# Altium PCB 10515.0461_全联供输出板_V1.0.PcbDoc (part 3 of 4)
Units mm, origin at the board's own origin, x right, y up, seen from the top; angles counter-clockwise.
Board outline 141.98 x 134.8 mm, 2 copper layers (Top Layer, Bottom Layer); 149 components, 131 nets, 632 pads, 485 vias.
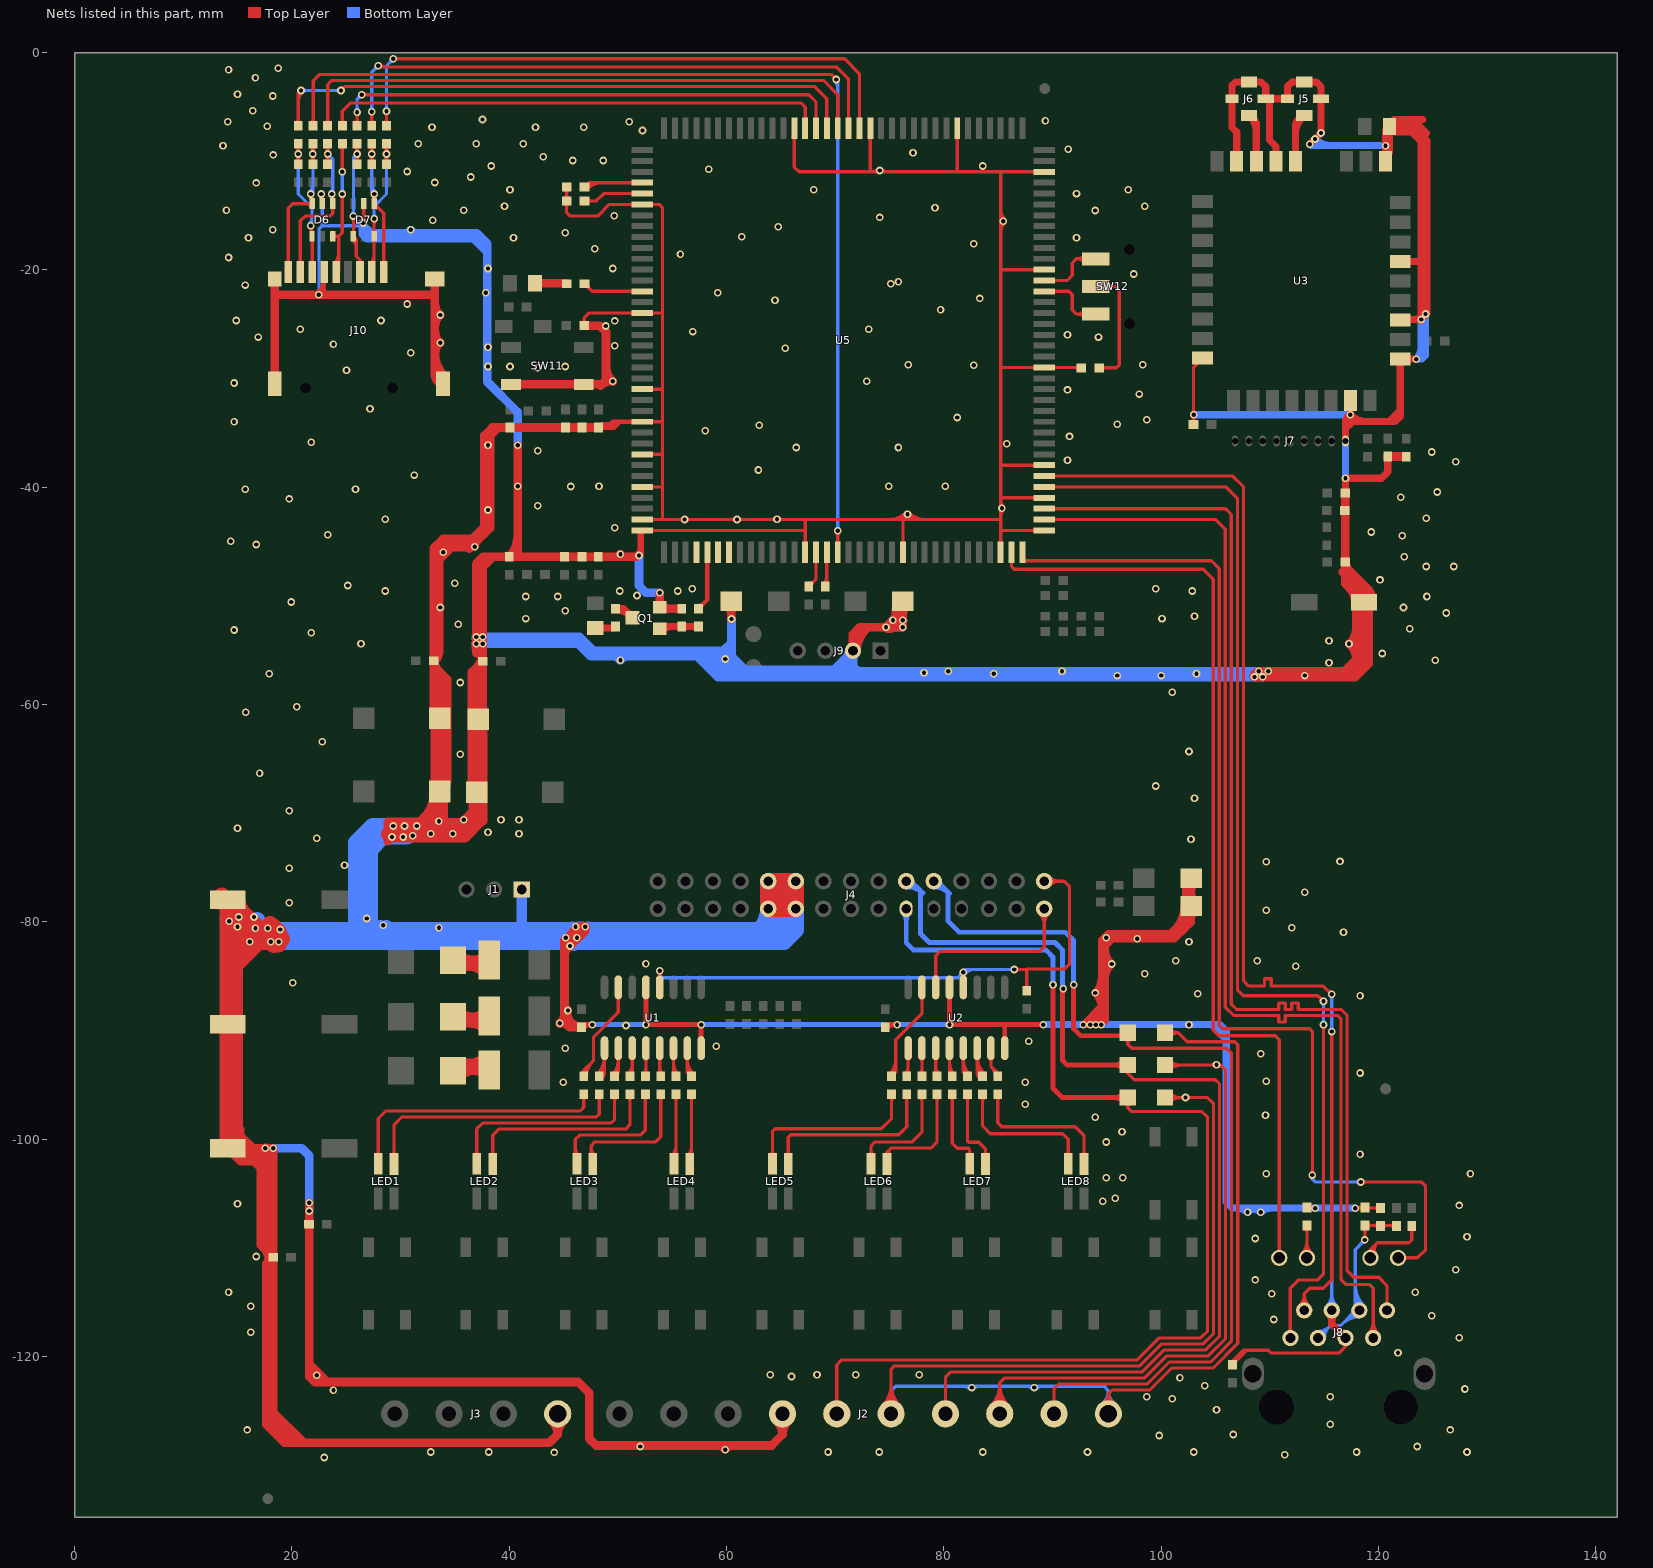
[diagram p3: the nets of this part, all layers, seen from the top]

## Via types
v1: diameter 0.7, hole 0.4, Top Layer to Bottom Layer, tented both sides, 485 vias

## Nets (pads, with @x,y where several pads share a name; then routed paths per layer and width w, separated by ;. In a path a pad name is that pad's centre, name@x,y a point inside that pad or via, vN(x,y) a via of type N, cw(c..) or ccw(c..) an arc to the next point about the centre after c; other vN are vias at no path point) (continued)
GND: (continued)
  other v1: 22.987,-129.301 111.379,-129.032 44.136,-128.831 32.766,-128.793 38.1,-128.793 69.342,-128.793 74.041,-128.793 83.566,-128.793 93.218,-128.793 102.997,-128.793 117.983,-128.793 128.143,-128.793 59.884,-128.577 52.07,-128.285 123.571,-128.285 99.822,-127.269 106.62,-127.18 15.875,-126.761 126.619,-126.761 115.57,-126.253 105.096,-124.894 101.032,-123.878 98.679,-123.713 115.57,-123.713 23.816,-123.116 127.956,-122.989 82.55,-122.862 88.332,-122.862 104.013,-122.697 101.727,-121.973 65.98,-121.846 22.292,-121.719 64.008,-121.681 68.326,-121.681 71.882,-121.681 77.724,-121.681 121.793,-119.649 127.448,-118.29 16.196,-117.782 110.363,-116.601 124.908,-116.258 16.196,-115.369 110.176,-114.226 14.164,-114.099 123.384,-114.099 108.652,-112.956 127.127,-112.029 16.704,-110.797 108.652,-109.146 128.143,-108.981 107.95,-106.733 109.16,-106.733 127.448,-106.098 14.986,-105.933 94.615,-105.717 95.758,-105.425 94.936,-103.558 96.46,-103.558 109.668,-103.177 128.464,-103.177 118.304,-101.399 94.936,-100.256 96.393,-99.329 93.92,-97.97 109.601,-97.805 87.503,-96.789 102.235,-96.167 44.958,-94.757 87.503,-94.757 109.668,-94.668 118.304,-93.906 105.096,-93.144 109.16,-92.128 45.152,-91.62 59.055,-91.44 87.824,-90.985 50.74,-89.535 93.472,-89.461 102.556,-89.461 44.644,-89.334 45.399,-88.153 118.304,-86.794 103.378,-86.629 93.92,-86.54 20.066,-85.613 98.492,-84.762 112.395,-84.089 52.578,-83.857 95.444,-83.873 101.346,-83.581 108.839,-83.581 45.593,-82.222 18.034,-81.841 102.556,-81.841 97.79,-81.549 45.212,-81.46 46.228,-81.46 94.936,-81.46 116.78,-80.952 18.923,-80.698 16.637,-80.571 17.78,-80.571 33.528,-80.533 112.014,-80.533 14.986,-80.444 46.101,-80.444 28.388,-80.317 26.888,-79.688 15.113,-79.555 16.51,-79.555 109.668,-78.92 19.752,-78.232 113.224,-77.269 19.752,-75.057 24.832,-74.803 109.668,-74.475 116.459,-74.437 102.743,-72.405 22.292,-72.316 29.21,-72.189 30.226,-72.189 31.115,-72.062 32.766,-71.897 34.798,-71.897 40.894,-71.897 38.04,-71.755 14.986,-71.389 30.353,-71.173 33.528,-70.739 35.814,-70.612 39.243,-70.612 40.894,-70.612 19.752,-69.776 103.064,-68.633 99.508,-67.49 17.018,-66.309 35.5,-64.569 102.556,-64.315 22.8,-63.426 15.748,-60.721 20.447,-60.213 101.032,-58.854 35.5,-57.965 95.952,-57.33 100.016,-57.33 113.224,-57.33 17.907,-57.165 84.582,-57.165 103.251,-57.165 78.172,-57.076 80.391,-56.949 90.872,-56.949 108.966,-56.949 115.443,-56.149 50.232,-55.933 125.222,-55.933 59.884,-55.806 120.336,-55.298 26.356,-54.409 117.288,-54.409 115.443,-54.117 21.784,-53.393 14.672,-53.139 122.876,-53.012 35.306,-52.593 76.2,-52.25 41.529,-52.085 100.076,-52.085 103.064,-51.869 126.238,-51.577 45.152,-51.361 33.655,-51.069 122.301,-51.069 19.939,-50.561 41.529,-50.053 44.45,-50.053 124.46,-50.053 51.756,-49.964 28.575,-49.545 50.165,-49.545 55.499,-49.545 102.87,-49.545 56.836,-49.329 99.508,-49.329 25.146,-49.037 34.992,-48.821 120.142,-48.529 124.4,-47.297 126.94,-47.297 122.368,-46.408 50.232,-46.154 33.909,-45.989 36.83,-45.481 16.704,-45.265 14.351,-44.973 122.174,-44.465 23.308,-44.376 119.32,-44.122 49.724,-43.741 56.134,-42.969 60.96,-42.969 28.575,-42.941 64.643,-42.941 124.4,-42.852 76.648,-42.471 38.04,-42.09 85.344,-41.925 42.612,-41.709 19.752,-41.074 122.047,-40.909 125.416,-40.439 15.688,-40.185 25.848,-40.185 45.66,-39.931 40.767,-39.893 48.26,-39.893 74.93,-39.893 80.137,-39.893 31.242,-38.877 62.932,-38.407 127.127,-37.645 91.38,-37.518 124.908,-36.756 42.612,-36.629 66.421,-36.337 75.819,-36.337 38.04,-36.121 85.792,-35.994 21.784,-35.867 91.567,-35.321 58.039,-34.813 62.992,-34.305 95.952,-34.216 14.672,-33.962 98.679,-33.797 81.22,-33.581 27.178,-32.781 97.984,-31.422 91.38,-31.041 14.672,-30.406 49.53,-30.241 72.898,-30.241 25.019,-29.225 42.612,-29.009 38.04,-28.882 40.072,-28.882 45.152,-28.882 82.744,-28.755 76.708,-28.717 98.298,-28.717 30.928,-27.612 65.405,-27.193 38.04,-27.104 49.724,-26.977 23.816,-26.85 33.655,-26.685 16.891,-26.177 94.234,-26.177 91.38,-25.961 56.896,-25.669 20.768,-25.453 73.092,-25.453 48.895,-25.161 49.724,-24.691 14.859,-24.653 28.194,-24.653 33.655,-24.145 79.696,-23.675 30.607,-23.129 64.456,-22.786 83.312,-22.621 37.846,-22.113 59.182,-22.113 15.688,-21.389 75.124,-21.262 75.819,-21.097 97.476,-20.373 38.04,-19.865 49.53,-19.865 14.164,-18.849 55.753,-18.557 47.879,-18.049 82.744,-17.579 16.002,-17.033 40.386,-17.033 92.202,-17.033 61.408,-16.944 45.152,-16.563 18.228,-16.309 30.928,-16.309 64.77,-16.017 85.471,-15.509 32.96,-15.42 74.108,-15.166 49.657,-15.001 93.92,-14.531 13.97,-14.493 35.814,-14.493 79.188,-14.277 39.564,-14.15 98.492,-14.15 22.694,-13.012 92.202,-12.969 40.072,-12.626 68.012,-12.626 96.968,-12.626 16.704,-11.991 33.147,-11.953 36.449,-11.445 30.607,-10.937 74.108,-10.848 58.36,-10.721 38.354,-10.429 83.566,-10.429 45.847,-9.921 48.641,-9.921 43.12,-9.578 18.288,-9.413 77.156,-9.197 91.44,-8.905 13.656,-8.562 31.623,-8.397 36.957,-8.397 41.275,-8.397 114.158,-7.942 52.264,-7.165 32.893,-6.873 42.418,-6.873 46.863,-6.873 17.72,-6.784 14.097,-6.365 51.054,-6.365 89.348,-6.276 37.532,-6.149 16.383,-5.349 18.228,-3.99 14.986,-3.825 16.637,-2.301 14.164,-1.577 18.736,-1.45
KNX_RS485_SELECT: U5.43
LED1: R35.1 U5.14 | length 7
  Top Layer w0.3: R35.1@46.926,-21.262 47.634,-21.969 U5.14@52.232,-21.969 ; R35.1@46.965,-21.518 cw(c46.965,-22.045) 47.337,-21.673 ; R35.1@47.221,-21.262 ccw(c47.932,-21.262) 47.429,-21.765 ; U5.14@51.419,-22.057 ccw(c51.205,-22.271) 51.205,-21.969 ccw(c51.205,-21.667) U5.14@51.419,-21.881
LED_FULL_COLOR_BLUE: R36.1 U5.41 | length 6.3
  Top Layer w0.4: R36.1@57.404,-51.17 58.232,-50.342 U5.41@58.232,-45.969 ; R36.1@57.404,-50.926 ccw(c57.404,-50.336) 57.821,-50.753 ; R36.1@57.61,-51.132 cw(c58.017,-51.132) R36.1@57.729,-50.845
LED_FULL_COLOR_GREEN: U5.42
LED_FULL_COLOR_RED: U5.40
MCU_CD: R66.1 U5.53 | length 100.7
  Top Layer w0.3: R66.1@21.747,-6.501 ccw(c21.207,-5.961) 21.971,-5.961 ; R66.1@21.971,-6.678 21.971,-5.472 21.971,-2.593 22.563,-2.001 69.639,-2.001 v1(70.104,-2.466) ; 21.971,-6.166 ccw(c22.445,-6.166) R66.1@22.11,-6.501 ; v1@69.904,-2.466 ccw(c69.421,-2.466) 69.763,-2.125 ccw(c70.104,-1.783) v1@70.104,-2.266 ; v1@70.091,-44.137 cw(c69.749,-44.479) 70.232,-44.479 cw(c70.715,-44.479) v1@70.373,-44.137 ; U5.53@70.144,-45.156 ccw(c69.93,-44.942) 70.232,-44.942 ccw(c70.534,-44.942) U5.53@70.32,-45.156 ; U5.53@70.232,-45.969 v1(70.232,-43.996)
  Bottom Layer w0.3: v1@69.963,-2.607 cw(c69.312,-3.258) 70.232,-3.258 ; v1@70.091,-43.855 ccw(c69.749,-43.513) 70.232,-43.513 ccw(c70.715,-43.513) v1@70.373,-43.855 ; v1(70.232,-43.996) 70.232,-8.816 ; 70.232,-8.562 70.232,-8.816 ; v1@70.232,-2.594 70.232,-8.816
MCU_CD1: D6.3 J10.9 R33.1 R66.2 | length 21.4
  Top Layer w0.3: J10.9@19.521,-19.389 ccw(c19.18,-19.048) 19.663,-19.048 ccw(c20.146,-19.048) J10.9@19.804,-19.389 ; J10.9@19.663,-20.181 19.663,-14.299 20.066,-13.896 D6.3@21.849,-13.896 v1@21.849,-13.012 ; v1@21.581,-13.153 cw(c20.933,-13.801) D6.3@21.849,-13.801 ; R33.1@21.747,-10.057 ccw(c21.31,-9.619) 21.929,-9.619 ccw(c22.548,-9.619) R33.1@22.11,-10.057 ; R66.2@21.747,-8.591 cw(c21.31,-9.029) 21.929,-9.029 cw(c22.548,-9.029) R66.2@22.11,-8.591 ; v1@21.787,-9.465 cw(c21.446,-9.807) 21.929,-9.807 cw(c22.412,-9.807) v1@22.07,-9.465 ; v1@21.787,-9.183 ccw(c21.446,-8.841) 21.929,-8.841 ccw(c22.412,-8.841) v1@22.07,-9.183 ; R33.1@21.929,-10.276 R66.2@21.929,-8.371
  Bottom Layer w0.3: v1@21.581,-12.871 ccw(c20.74,-12.03) 21.929,-12.03 ; v1@21.787,-9.465 cw(c21.446,-9.807) 21.929,-9.807 cw(c22.412,-9.807) v1@22.07,-9.465 ; v1@21.849,-13.012 21.929,-12.932 v1(21.929,-9.324)
  other v1: 21.722,-13.012
MCU_CLK: R69.1 U5.127 | length 47.8
  Top Layer w0.3: R69.1@24.457,-6.501 ccw(c24.019,-6.063) 24.638,-6.063 ccw(c25.257,-6.063) R69.1@24.819,-6.501 ; R69.1@24.638,-6.72 24.638,-5.387 25.4,-4.625 66.851,-4.625 67.232,-5.006 U5.127@67.232,-6.969 ; U5.127@67.144,-6.156 ccw(c66.93,-5.942) 67.232,-5.942 ccw(c67.534,-5.942) U5.127@67.32,-6.156
MCU_CLK1: D6.6 J10.5 R69.2 | length 18.1
  Top Layer w0.3: D6.6@23.749,-16.896 24.313,-16.896 ; J10.5@23.918,-19.389 ccw(c22.963,-18.435) 24.313,-18.435 ; J10.5@24.13,-19.602 ccw(c23.688,-19.159) 24.313,-19.159 ; J10.5@24.313,-20.181 24.313,-16.896 ; R69.2@24.457,-8.591 cw(c24.019,-9.029) 24.638,-9.029 cw(c25.257,-9.029) R69.2@24.819,-8.591 ; v1@24.497,-13.153 cw(c24.155,-13.495) 24.638,-13.495 cw(c25.121,-13.495) v1@24.779,-13.153 ; v1@24.497,-10.834 ccw(c24.155,-10.492) 24.638,-10.492 ccw(c25.121,-10.492) v1@24.779,-10.834 ; v1@24.638,-13.007 24.638,-16.571 24.313,-16.896 ; v1(24.638,-10.975) R69.2@24.638,-8.371
  Bottom Layer w0.3: v1@24.497,-12.871 ccw(c24.155,-12.529) 24.638,-12.529 ccw(c25.121,-12.529) v1@24.779,-12.871 ; v1@24.497,-11.116 cw(c24.155,-11.458) 24.638,-11.458 cw(c25.121,-11.458) v1@24.779,-11.116 ; v1@24.638,-13.007 v1(24.638,-10.975)
  other v1: 24.638,-13.012
MCU_CMD: R70.1 U5.126 | length 52
  Top Layer w0.3: R70.1@25.811,-6.501 ccw(c25.374,-6.063) 25.993,-6.063 ccw(c26.612,-6.063) R70.1@26.174,-6.501 ; v1@25.851,-5.613 cw(c25.51,-5.955) 25.993,-5.955 cw(c26.476,-5.955) v1@26.134,-5.613 ; R70.1@25.993,-6.72 v1(25.993,-5.472) ; v1(26.416,-3.863) 67.564,-3.863 68.232,-4.531 U5.126@68.232,-6.969 ; v1@26.557,-4.004 cw(c26.899,-4.346) 26.899,-3.863 cw(c26.899,-3.38) v1@26.557,-3.722 ; U5.126@68.144,-6.156 ccw(c67.93,-5.942) 68.232,-5.942 ccw(c68.534,-5.942) U5.126@68.32,-6.156
  Bottom Layer w0.3: v1@25.851,-5.33 ccw(c25.51,-4.989) 25.993,-4.989 ccw(c26.476,-4.989) v1@26.134,-5.33 ; v1(25.993,-5.472) 25.993,-4.286 v1(26.416,-3.863) ; v1@26.216,-3.863 cw(c25.733,-3.863) 26.075,-4.204 cw(c26.416,-4.546) v1@26.416,-4.063
MCU_CMD1: D7.4 J10.3 R30.1 R70.2 | length 22.7
  Top Layer w0.3: v1@25.513,-15.18 cw(c25.171,-15.522) 25.654,-15.522 cw(c26.137,-15.522) v1@25.795,-15.18 ; D7.4@25.583,-17.217 cw(c24.799,-18.001) 25.908,-18.001 ; v1(25.654,-15.039) D7.4@25.654,-16.896 25.908,-17.15 25.908,-18.722 26.258,-19.072 ; D7.4@25.795,-17.005 cw(c25.524,-17.276) 25.908,-17.276 ; R30.1@25.811,-10.057 ccw(c25.374,-9.619) 25.993,-9.619 ccw(c26.612,-9.619) R30.1@26.174,-10.057 ; R70.2@25.811,-8.591 cw(c25.374,-9.029) 25.993,-9.029 cw(c26.612,-9.029) R70.2@26.174,-8.591 ; v1@25.851,-9.465 cw(c25.51,-9.807) 25.993,-9.807 cw(c26.476,-9.807) v1@26.134,-9.465 ; v1@25.851,-9.183 ccw(c25.51,-8.841) 25.993,-8.841 ccw(c26.476,-8.841) v1@26.134,-9.183 ; R30.1@25.993,-10.276 R70.2@25.993,-8.371 ; J10.3@26.121,-19.384 ccw(c25.83,-19.072) 26.258,-19.072 ; 26.141,-18.955 cw(c25.613,-19.482) J10.3@26.357,-19.538 ; J10.3@26.258,-20.181 26.258,-19.072 ; J10.3@26.394,-19.384 cw(c26.685,-19.072) 26.258,-19.072
  Bottom Layer w0.3: v1@25.513,-14.898 ccw(c25.171,-14.556) 25.654,-14.556 ccw(c26.137,-14.556) v1@25.795,-14.898 ; v1(25.654,-15.039) 25.654,-9.663 v1(25.993,-9.324) ; 25.654,-10.624 cw(c27.293,-10.624) v1@26.134,-9.465 ; 25.654,-9.9 cw(c26.569,-9.9) v1@25.922,-9.253
MCU_DATA0: R68.1 U5.125 | length 60.4
  Top Layer w0.3: R68.1@20.393,-6.501 ccw(c19.955,-6.063) 20.574,-6.063 ccw(c21.193,-6.063) R68.1@20.755,-6.501 ; R68.1@20.574,-6.72 20.574,-3.736 v1(20.828,-3.482) ; 20.574,-4.578 cw(c21.924,-4.578) v1@20.969,-3.623 ; 20.574,-3.854 cw(c21.2,-3.854) v1@20.757,-3.411 ; v1(24.511,-3.482) 24.884,-3.109 68.08,-3.109 69.232,-4.261 U5.125@69.232,-6.969 ; v1@24.511,-3.282 ccw(c24.511,-2.799) 24.852,-3.141 ccw(c25.194,-3.482) v1@24.711,-3.482 ; U5.125@69.144,-6.156 ccw(c68.93,-5.942) 69.232,-5.942 ccw(c69.534,-5.942) U5.125@69.32,-6.156
  Bottom Layer w0.3: v1(20.828,-3.482) v1(24.511,-3.482) ; v1@20.969,-3.623 cw(c21.311,-3.965) 21.311,-3.482 cw(c21.311,-2.999) v1@20.969,-3.341 ; v1@24.37,-3.623 ccw(c24.028,-3.965) 24.028,-3.482 ccw(c24.028,-2.999) v1@24.37,-3.341
MCU_DATA1: R67.1 U5.124 | length 56
  Top Layer w0.3: R67.1@23.102,-6.501 ccw(c22.664,-6.063) 23.283,-6.063 ccw(c23.902,-6.063) R67.1@23.465,-6.501 ; R67.1@23.283,-6.72 23.283,-2.932 23.66,-2.555 68.923,-2.555 70.232,-3.864 U5.124@70.232,-6.969 ; U5.124@70.144,-6.156 ccw(c69.93,-5.942) 70.232,-5.942 ccw(c70.534,-5.942) U5.124@70.32,-6.156
MCU_DATA01: D6.4 J10.7 R31.1 R68.2 | length 19.8
  Top Layer w0.3: R31.1@20.393,-10.057 ccw(c19.955,-9.619) 20.574,-9.619 ccw(c21.193,-9.619) R31.1@20.755,-10.057 ; R68.2@20.393,-8.591 cw(c19.955,-9.029) 20.574,-9.029 cw(c21.193,-9.029) R68.2@20.755,-8.591 ; v1@20.433,-9.465 cw(c20.091,-9.807) 20.574,-9.807 cw(c21.057,-9.807) v1@20.715,-9.465 ; v1@20.433,-9.183 ccw(c20.091,-8.841) 20.574,-8.841 ccw(c21.057,-8.841) v1@20.715,-9.183 ; R31.1@20.574,-10.276 R68.2@20.574,-8.371 ; v1@21.576,-16.069 cw(c20.928,-16.717) D6.4@21.844,-16.717 ; J10.7@21.723,-19.389 ccw(c21.382,-19.048) 21.865,-19.048 ccw(c22.347,-19.048) J10.7@22.006,-19.389 ; D6.4@21.773,-17.217 cw(c21.553,-17.437) 21.865,-17.437 ; D6.4@21.844,-16.896 v1@21.844,-15.928 ; J10.7@21.865,-20.181 D6.4@21.865,-17.044
  Bottom Layer w0.3: v1@20.433,-9.465 cw(c20.091,-9.807) 20.574,-9.807 cw(c21.057,-9.807) v1@20.715,-9.465 ; v1(20.574,-9.324) 20.574,-13.007 21.844,-14.277 v1@21.844,-15.928 ; v1@21.576,-15.787 ccw(c20.928,-15.139) 21.844,-15.139
  other v1: 21.717,-15.928
MCU_DATA2: R72.1 U5.123 | length 58.5
  Top Layer w0.3: R72.1@27.166,-6.501 ccw(c26.728,-6.063) 27.347,-6.063 ccw(c27.966,-6.063) R72.1@27.529,-6.501 ; v1@27.206,-5.571 cw(c26.864,-5.912) 27.347,-5.912 cw(c27.83,-5.912) v1@27.489,-5.571 ; R72.1@27.347,-6.72 v1(27.347,-5.429) ; v1(27.94,-1.196) 28.059,-1.315 70.096,-1.315 71.232,-2.451 U5.123@71.232,-6.969 ; v1@28.081,-1.055 ccw(c28.71,-0.426) 28.71,-1.315 ; U5.123@71.144,-6.156 ccw(c70.93,-5.942) 71.232,-5.942 ccw(c71.534,-5.942) U5.123@71.32,-6.156
  Bottom Layer w0.3: v1@27.206,-5.288 ccw(c26.864,-4.946) 27.347,-4.946 ccw(c27.83,-4.946) v1@27.489,-5.288 ; v1(27.347,-5.429) 27.347,-1.789 v1(27.94,-1.196) ; v1@27.74,-1.196 cw(c27.257,-1.196) 27.599,-1.537 cw(c27.94,-1.879) v1@27.94,-1.396
MCU_DATA3: R71.1 U5.122 | length 58.6
  Top Layer w0.3: R71.1@28.521,-6.501 ccw(c28.083,-6.063) 28.702,-6.063 ccw(c29.321,-6.063) R71.1@28.883,-6.501 ; v1@28.561,-5.528 cw(c28.219,-5.87) 28.702,-5.87 cw(c29.185,-5.87) v1@28.843,-5.528 ; R71.1@28.702,-6.72 v1(28.702,-5.387) ; v1(29.337,-0.561) 70.866,-0.561 72.232,-1.927 U5.122@72.232,-6.969 ; U5.122@72.144,-6.156 ccw(c71.93,-5.942) 72.232,-5.942 ccw(c72.534,-5.942) U5.122@72.32,-6.156
  Bottom Layer w0.3: v1@28.561,-5.246 ccw(c28.219,-4.904) 28.702,-4.904 ccw(c29.185,-4.904) v1@28.843,-5.246 ; v1(28.702,-5.387) 28.702,-1.196 v1(29.337,-0.561) ; v1@29.137,-0.561 cw(c28.654,-0.561) 28.996,-0.902 cw(c29.337,-1.244) v1@29.337,-0.761
MCU_DATA11: D6.1 J10.8 R32.1 R67.2 | length 21.7
  Top Layer w0.3: J10.8@20.625,-19.389 ccw(c20.284,-19.048) 20.767,-19.048 ccw(c21.249,-19.048) J10.8@20.908,-19.389 ; J10.8@20.767,-20.181 20.767,-15.481 21.209,-15.039 23.495,-15.039 23.749,-14.785 D6.1@23.749,-13.896 v1@23.749,-13.007 ; R32.1@23.102,-10.057 ccw(c22.664,-9.619) 23.283,-9.619 ccw(c23.902,-9.619) R32.1@23.465,-10.057 ; R67.2@23.102,-8.591 cw(c22.664,-9.029) 23.283,-9.029 cw(c23.902,-9.029) R67.2@23.465,-8.591 ; v1@23.142,-9.465 cw(c22.8,-9.807) 23.283,-9.807 cw(c23.766,-9.807) v1@23.425,-9.465 ; v1@23.142,-9.183 ccw(c22.8,-8.841) 23.283,-8.841 ccw(c23.766,-8.841) v1@23.425,-9.183 ; R32.1@23.283,-10.276 R67.2@23.283,-8.371 ; v1@23.525,-13.153 cw(c22.983,-13.695) D6.1@23.749,-13.695
  Bottom Layer w0.3: v1@23.283,-9.524 cw(c23.283,-10.007) 23.625,-9.665 cw(c23.966,-9.324) v1@23.483,-9.324 ; v1(23.283,-9.324) 23.58,-9.62 23.749,-9.79 v1@23.749,-13.007 ; v1@23.525,-12.871 ccw(c22.983,-12.329) 23.749,-12.329
  other v1: 23.666,-13.012
MCU_DATA21: D7.1 J10.1 R50.1 R72.2 | length 20.6
  Top Layer w0.3: R50.1@27.166,-10.057 ccw(c26.728,-9.619) 27.347,-9.619 ccw(c27.966,-9.619) R50.1@27.529,-10.057 ; R72.2@27.166,-8.591 cw(c26.728,-9.029) 27.347,-9.029 cw(c27.966,-9.029) R72.2@27.529,-8.591 ; v1@27.206,-9.465 cw(c26.864,-9.807) 27.347,-9.807 cw(c27.83,-9.807) v1@27.489,-9.465 ; v1@27.206,-9.183 ccw(c26.864,-8.841) 27.347,-8.841 ccw(c27.83,-8.841) v1@27.489,-9.183 ; R50.1@27.347,-10.276 R72.2@27.347,-8.371 ; v1@27.418,-13.148 cw(c27.076,-13.49) 27.559,-13.49 cw(c28.042,-13.49) v1@27.7,-13.148 ; D7.1@27.559,-14.246 cw(c27.559,-15.091) 28.156,-14.493 ; v1(27.559,-13.007) D7.1@27.559,-13.896 28.454,-14.791 J10.1@28.454,-20.181 ; J10.1@28.312,-19.389 ccw(c27.971,-19.048) 28.454,-19.048 ccw(c28.936,-19.048) J10.1@28.595,-19.389
  Bottom Layer w0.3: v1@27.206,-9.465 cw(c26.864,-9.807) 27.347,-9.807 cw(c27.83,-9.807) v1@27.489,-9.465 ; 27.347,-12.013 ccw(c28.553,-12.013) v1@27.7,-12.866 ; v1(27.347,-9.324) 27.347,-12.795 v1(27.559,-13.007)
MCU_DATA31: D7.6 J10.2 R52.1 R71.2 | length 20
  Top Layer w0.3: J10.2@27.213,-19.391 ccw(c26.376,-18.555) 27.559,-18.555 ; J10.2@27.354,-20.183 27.354,-19.435 27.559,-19.23 D7.6@27.559,-16.896 v1(27.559,-15.293) ; v1@27.418,-15.434 cw(c27.076,-15.776) 27.559,-15.776 cw(c28.042,-15.776) v1@27.7,-15.434 ; R52.1@28.521,-10.057 ccw(c28.083,-9.619) 28.702,-9.619 ccw(c29.321,-9.619) R52.1@28.883,-10.057 ; R71.2@28.521,-8.591 cw(c28.083,-9.029) 28.702,-9.029 cw(c29.321,-9.029) R71.2@28.883,-8.591 ; v1@28.561,-9.465 cw(c28.219,-9.807) 28.702,-9.807 cw(c29.185,-9.807) v1@28.843,-9.465 ; v1@28.561,-9.183 ccw(c28.219,-8.841) 28.702,-8.841 ccw(c29.185,-8.841) v1@28.843,-9.183 ; R52.1@28.702,-10.276 R71.2@28.702,-8.371
  Bottom Layer w0.3: v1@27.418,-15.152 ccw(c27.076,-14.81) 27.559,-14.81 ccw(c28.042,-14.81) v1@27.7,-15.152 ; v1(27.559,-15.293) 27.559,-14.15 28.702,-13.007 v1(28.702,-9.324) ; v1@28.561,-9.465 cw(c28.219,-9.807) 28.702,-9.807 cw(c29.185,-9.807) v1@28.843,-9.465
MOD_BOOT_NAND: SW12.3 U5.93 | length 8.6
  Top Layer w0.3: U5.93@89.232,-21.969 91.512,-21.969 91.821,-22.278 91.821,-23.675 92.202,-24.056 SW12.3@93.98,-24.056 ; U5.93@90.045,-22.057 cw(c90.259,-22.271) 90.259,-21.969 cw(c90.259,-21.667) U5.93@90.045,-21.881 ; SW12.3@92.992,-24.374 ccw(c92.224,-25.142) 92.224,-24.056 ccw(c92.224,-22.97) SW12.3@92.992,-23.738
MOD_BOOT_SD: SW12.1 U5.94 | length 8.4
  Top Layer w0.3: U5.94@89.232,-20.969 91.352,-20.969 91.821,-20.5 91.821,-19.357 92.202,-18.976 SW12.1@93.98,-18.976 ; U5.94@90.045,-21.057 cw(c90.259,-21.271) 90.259,-20.969 cw(c90.259,-20.667) U5.94@90.045,-20.881 ; SW12.1@92.992,-19.294 ccw(c92.224,-20.062) 92.224,-18.976 ccw(c92.224,-17.89) SW12.1@92.992,-18.658
NET0_LED_ACT: J8.12 U5.70 | length 106.8
  Top Layer w0.3: U5.70@87.232,-45.969 87.232,-46.772 104.631,-46.772 105.353,-47.494 105.353,-89.531 105.664,-89.842 113.665,-89.842 113.919,-90.096 v1(113.919,-103.304) ; U5.70@87.32,-46.606 ccw(c87.722,-46.204) 87.722,-46.772 ; v1@113.778,-103.163 ccw(c113.436,-102.821) 113.919,-102.821 ccw(c114.402,-102.821) v1@114.06,-103.163 ; v1(118.364,-103.939) 123.952,-103.939 124.333,-104.32 124.333,-110.162 123.571,-110.924 J8.12@121.801,-110.924 ; v1@118.505,-104.08 cw(c118.847,-104.422) 118.847,-103.939 cw(c118.847,-103.456) v1@118.505,-103.798
  Bottom Layer w0.3: v1(113.919,-103.304) 113.919,-103.685 ; v1@118.223,-104.08 ccw(c117.881,-104.422) 117.881,-103.939 ccw(c117.881,-103.456) v1@118.223,-103.798 ; v1(118.364,-103.939) 114.173,-103.939 113.919,-103.685 ; 113.919,-103.685 cw(c114.182,-103.685) 114.033,-103.469 ccw(c114.182,-103.685) 113.919,-103.685 ; 113.919,-103.685 ccw(c113.656,-103.685) 113.805,-103.469 cw(c113.656,-103.685) 113.919,-103.685
NET0_LED_LINK: J8.9 U5.69 | length 88.9
  Top Layer w0.3: U5.69@86.144,-46.782 cw(c85.93,-46.996) 86.232,-46.996 cw(c86.534,-46.996) U5.69@86.32,-46.782 ; U5.69@86.232,-45.969 86.232,-47.296 86.487,-47.551 103.886,-47.551 104.799,-48.464 104.799,-89.993 105.283,-90.477 110.49,-90.477 110.871,-90.858 J8.9@110.871,-110.924
NET0_MDN0: J8.2 U5.72 | length 107.9
  Top Layer w0.3: U5.72@89.232,-42.969 105.019,-42.969 105.907,-43.857 105.907,-87.844 106.681,-88.618 108.204,-88.618 108.504,-88.618 109.104,-88.618 109.323,-88.618 109.623,-88.618 110.223,-88.618 110.823,-88.618 110.823,-89.218 111.423,-89.218 111.423,-88.618 113.538,-88.618 116.251,-88.618 116.54,-88.907 116.54,-112.91 117.013,-113.383 119.18,-113.383 119.511,-113.714 J8.2@119.511,-118.294 ; U5.72@90.045,-43.057 cw(c90.259,-43.271) 90.259,-42.969 cw(c90.259,-42.667) U5.72@90.045,-42.881 ; J8.2@119.087,-117.87 ccw(c118.062,-116.845) 119.511,-116.845 ccw(c120.96,-116.845) J8.2@119.935,-117.87
NET0_MDN1: J8.8 U5.75 | length 108.6
  Top Layer w0.3: U5.75@89.232,-39.969 105.956,-39.969 107.015,-41.028 107.015,-86.24 107.569,-86.794 114.427,-86.794 v1(114.935,-87.302) ; U5.75@90.045,-40.057 cw(c90.259,-40.271) 90.259,-39.969 cw(c90.259,-39.667) U5.75@90.045,-39.881 ; J8.8@111.891,-118.294 111.891,-113.714 112.649,-112.956 114.427,-112.956 114.935,-112.448 v1(114.935,-89.461) ; v1@114.735,-87.302 ccw(c114.252,-87.302) 114.594,-86.961 ccw(c114.935,-86.619) v1@114.935,-87.102 ; v1@114.794,-89.602 cw(c114.452,-89.944) 114.935,-89.944 cw(c115.418,-89.944) v1@115.076,-89.602
  Bottom Layer w0.3: v1@114.794,-89.32 ccw(c114.452,-88.978) 114.935,-88.978 ccw(c115.418,-88.978) v1@115.076,-89.32 ; v1@114.794,-87.443 cw(c114.452,-87.785) 114.935,-87.785 cw(c115.418,-87.785) v1@115.076,-87.443 ; v1(114.935,-89.461) v1(114.935,-87.302)
NET0_MDP0: J8.1 U5.73 | length 106.5
  Top Layer w0.3: U5.73@89.232,-41.969 105.924,-41.969 106.461,-42.506 106.461,-87.578 106.947,-88.064 108.712,-88.064 109.012,-88.064 109.612,-88.064 109.923,-88.064 110.223,-88.064 110.823,-88.064 110.823,-87.464 111.423,-87.464 111.423,-88.064 112.023,-88.064 112.023,-87.464 112.623,-87.464 112.623,-88.064 113.284,-88.064 116.586,-88.064 117.094,-88.572 117.094,-112.067 117.729,-112.702 120.015,-112.702 120.781,-113.468 J8.1@120.781,-115.754 ; U5.73@90.045,-42.057 cw(c90.259,-42.271) 90.259,-41.969 cw(c90.259,-41.667) U5.73@90.045,-41.881
NET0_MDP1: J8.7 U5.76 | length 110.9
  Top Layer w0.3: U5.76@89.232,-38.969 106.607,-38.969 107.569,-39.931 107.569,-85.397 108.077,-85.905 109.22,-85.905 109.52,-85.905 109.52,-85.229 110.12,-85.229 110.12,-85.905 111.506,-85.905 113.157,-85.905 114.935,-85.905 v1(115.697,-86.667) ; U5.76@90.045,-39.057 cw(c90.259,-39.271) 90.259,-38.969 cw(c90.259,-38.667) U5.76@90.045,-38.881 ; J8.7@112.737,-115.33 ccw(c111.712,-114.305) 113.161,-114.305 ccw(c114.61,-114.305) J8.7@113.585,-115.33 ; J8.7@113.161,-115.754 113.161,-114.222 113.665,-113.718 114.935,-113.718 115.697,-112.956 v1(115.697,-90.096) ; v1@115.497,-86.667 ccw(c115.014,-86.667) 115.356,-86.326 ccw(c115.697,-85.984) v1@115.697,-86.467 ; v1@115.556,-90.237 cw(c115.214,-90.579) 115.697,-90.579 cw(c116.18,-90.579) v1@115.838,-90.237
  Bottom Layer w0.3: v1@115.556,-89.955 ccw(c115.214,-89.613) 115.697,-89.613 ccw(c116.18,-89.613) v1@115.838,-89.955 ; v1@115.556,-86.808 cw(c115.214,-87.15) 115.697,-87.15 cw(c116.18,-87.15) v1@115.838,-86.808 ; v1(115.697,-90.096) v1(115.697,-86.667)
NetC15_1: C15.1 C16.2 J8.3 J8.6 L2.2 | length 33
  Top Layer w0.3: C15.1@118.571,-108.161 cw(c118.134,-108.599) 118.753,-108.599 cw(c119.372,-108.599) C15.1@118.934,-108.161 ; v1@118.604,-109.132 ccw(c118.243,-108.771) 118.753,-108.771 ; v1@118.753,-109.265 C15.1@118.753,-107.942 L2.2@121.618,-107.942 ; 118.753,-108.809 ccw(c119.209,-108.809) v1@118.886,-109.132 ; C15.1@118.934,-108.123 cw(c119.372,-108.561) 119.372,-107.942 cw(c119.372,-107.323) C15.1@118.934,-107.76 ; 119.556,-107.942 cw(c119.556,-108.585) C16.2@120.011,-108.13 ; 119.59,-107.942 ccw(c119.59,-107.347) C16.2@120.011,-107.768 ; C16.2@120.373,-108.13 cw(c120.828,-108.585) 120.828,-107.942 ; C16.2@120.373,-107.768 ccw(c120.794,-107.347) 120.794,-107.942 ; 121.024,-107.942 cw(c121.024,-108.593) L2.2@121.485,-108.133 ; 121.07,-107.942 ccw(c121.07,-107.355) L2.2@121.485,-107.77
  Bottom Layer w0.3: J8.6@114.431,-118.294 115.578,-117.147 116.508,-117.147 117.901,-115.754 J8.3@118.241,-115.754 ; J8.6@114.431,-117.694 ccw(c114.431,-116.245) 115.455,-117.27 ccw(c116.48,-118.294) J8.6@115.031,-118.294 ; 116.636,-117.019 cw(c118.241,-118.623) J8.3@118.241,-116.354 ; 117.148,-116.507 cw(c118.241,-117.599) J8.3@118.241,-116.054 ; 117.457,-116.198 ccw(c117.013,-115.754) J8.3@117.641,-115.754 ; 117.856,-114.825 ccw(c119.17,-114.825) J8.3@118.241,-115.754 ; 117.856,-114.1 ccw(c119.895,-114.1) J8.3@118.453,-115.542 ; 117.856,-113.376 ccw(c120.619,-113.376) J8.3@118.665,-115.33 ; v1@118.545,-109.273 cw(c118.062,-109.273) 118.404,-109.614 cw(c118.745,-109.956) v1@118.745,-109.473 ; v1(118.745,-109.273) 117.856,-110.162 117.856,-115.369 J8.3@118.241,-115.754
NetD1_2: D1.2 F1.2 | length 17.1
  Top Layer w0.8: D1.2@34.823,-83.543 35.408,-84.127 F1.2@37.549,-84.127 ; D1.2@34.856,-83.51 F1.2@38.166,-83.51 F1.2@37.549,-84.127 ; D1.2@35.389,-84.108 cw(c36.833,-85.552) 36.833,-83.51 ; D1.2@35.389,-82.977 ccw(c36.677,-81.69) 36.677,-83.51 ; D1.2@35.449,-83.115 ccw(c37.549,-81.444) F1.2@37.549,-84.127 ; 36.274,-84.127 cw(c36.274,-86.202) F1.2@37.741,-84.735 ; 37.16,-84.127 ccw(c37.16,-83.305) F1.2@37.741,-83.886 ; F1.2@37.741,-83.935 ccw(c36.717,-84.959) 36.717,-83.51 ccw(c36.717,-82.062) F1.2@37.741,-83.086
NetD2_2: D2.2 F2.1 | length 17.7
  Top Layer w0.8: D2.2@34.823,-93.633 cw(c36.039,-94.408) 36.039,-92.966 ; D2.2@35.389,-94.268 cw(c36.755,-95.634) 36.755,-93.703 cw(c36.755,-91.771) D2.2@35.389,-93.137 ; D2.2@35.498,-94.063 cw(c37.498,-95.338) 37.498,-92.966 35.56,-92.966 D2.2@34.823,-93.703 F2.1@38.096,-93.703 ; 36.397,-92.966 ccw(c36.397,-91.065) F2.1@37.741,-92.409 ; 36.55,-93.703 ccw(c36.55,-92.018) F2.1@37.741,-93.209 ; 36.884,-93.703 cw(c36.884,-94.915) F2.1@37.741,-94.058 ; 37.037,-92.966 cw(c37.037,-93.962) F2.1@37.741,-93.258
NetD3_2: D3.2 F3.1 | length 16.2
  Top Layer w0.8: D3.2@35.389,-89.315 cw(c36.755,-90.681) 36.755,-88.75 cw(c36.755,-86.818) D3.2@35.389,-88.184 ; D3.2@35.455,-88.328 ccw(c37.512,-86.727) 37.512,-89.334 35.408,-89.334 D3.2@34.823,-88.75 F3.1@38.096,-88.75 ; 36.363,-89.334 cw(c36.363,-91.283) F3.1@37.741,-89.905 ; 36.55,-88.75 ccw(c36.55,-87.065) F3.1@37.741,-88.256 ; 36.884,-88.75 cw(c36.884,-89.962) F3.1@37.741,-89.105 ; 37.071,-89.334 ccw(c37.071,-88.386) F3.1@37.741,-89.056
NetJ5_1: J5.1 U3.4 | length 9.2
  Top Layer w0.65: U3.4@112.159,-9.464 ccw(c111.689,-8.994) 112.353,-8.994 ccw(c113.017,-8.994) U3.4@112.547,-9.464 ; U3.4@112.353,-10.008 112.353,-6.598 J5.1@113.157,-5.794 ; 112.353,-7.554 cw(c114.667,-7.554) J5.1@113.031,-5.918 ; 112.353,-6.77 cw(c113.196,-6.77) J5.1@112.957,-5.962 ; 112.478,-6.473 ccw(c111.861,-5.855) J5.1@112.732,-5.804
NetJ6_1: J6.1 U3.6 | length 8.4
  Top Layer w0.65: J6.1@108.077,-5.794 108.753,-6.47 U3.6@108.753,-10.008 ; J6.1@108.203,-5.918 cw(c106.876,-7.245) 108.753,-7.245 ; J6.1@108.278,-5.962 cw(c108.096,-6.593) 108.753,-6.593 ; J6.1@108.496,-5.841 ccw(c108.993,-5.98) 108.628,-6.345 ; U3.6@108.559,-9.464 ccw(c108.089,-8.994) 108.753,-8.994 ccw(c109.417,-8.994) U3.6@108.947,-9.464
NetJ8_10: J8.10 R40.1 | length 6.2
  Top Layer w0.3: J8.10@112.987,-110.5 ccw(c111.962,-109.475) 113.411,-109.475 ccw(c114.859,-109.476) J8.10@113.835,-110.5 ; R40.1@113.23,-108.159 cw(c112.792,-108.597) 113.411,-108.597 cw(c114.03,-108.597) R40.1@113.592,-108.159 ; J8.10@113.411,-110.924 R40.1@113.411,-107.939
NetJ8_11: J8.11 R41.1 | length 10.4
  Top Layer w0.3: 119.357,-110.058 ccw(c119.851,-110.551) J8.11@119.261,-110.924 119.261,-110.154 119.888,-109.527 ; J8.11@119.515,-110.764 cw(c120.176,-110.346) 119.623,-109.792 ; J8.11@119.768,-110.603 cw(c120.501,-110.14) 119.888,-109.527 ; R41.1@122.882,-108.209 cw(c122.444,-108.647) 123.063,-108.647 cw(c123.682,-108.647) R41.1@123.244,-108.209 ; R41.1@123.063,-107.989 123.063,-109.273 122.809,-109.527 119.888,-109.527
NetLED1_2: LED1.2 R1.2 | length 27
  Top Layer w0.3: LED1.2@27.763,-101.486 ccw(c27.336,-101.059) 27.94,-101.059 ccw(c28.544,-101.059) LED1.2@28.117,-101.486 ; LED1.2@27.94,-102.644 27.94,-98.097 28.632,-97.405 46.539,-97.405 46.863,-97.081 R1.2@46.863,-95.874 ; R1.2@46.682,-96.094 cw(c46.244,-96.532) 46.863,-96.532 cw(c47.482,-96.532) R1.2@47.044,-96.094
NetLED1_4: LED1.4 R2.2 | length 27
  Top Layer w0.3: LED1.4@29.223,-101.511 ccw(c28.796,-101.084) 29.4,-101.084 ccw(c30.004,-101.084) LED1.4@29.577,-101.511 ; LED1.4@29.4,-102.669 29.4,-98.669 30.11,-97.959 48.017,-97.959 48.278,-97.698 R2.2@48.278,-95.874 ; R2.2@48.097,-96.094 cw(c47.659,-96.532) 48.278,-96.532 cw(c48.897,-96.532) R2.2@48.459,-96.094
NetLED2_2: LED2.2 R3.2 | length 20.9
  Top Layer w0.3: LED2.2@36.835,-101.486 ccw(c36.408,-101.059) 37.011,-101.059 ccw(c37.615,-101.059) LED2.2@37.188,-101.486 ; LED2.2@37.011,-102.644 37.011,-99.059 37.557,-98.513 49.368,-98.513 49.693,-98.188 R3.2@49.693,-95.874 ; R3.2@49.512,-96.094 cw(c49.074,-96.532) 49.693,-96.532 cw(c50.312,-96.532) R3.2@49.875,-96.094
NetLED2_4: LED2.4 R4.2 | length 20.8
  Top Layer w0.3: LED2.4@38.295,-101.511 ccw(c37.868,-101.084) 38.471,-101.084 ccw(c39.075,-101.084) LED2.4@38.648,-101.511 ; LED2.4@38.471,-102.669 38.471,-99.631 39.035,-99.067 50.719,-99.067 51.108,-98.678 R4.2@51.108,-95.874 ; R4.2@50.927,-96.094 cw(c50.489,-96.532) 51.108,-96.532 cw(c51.727,-96.532) R4.2@51.29,-96.094
NetLED3_2: LED3.2 R6.2 | length 14.2
  Top Layer w0.3: LED3.2@46.083,-102.263 46.083,-100.02 46.482,-99.621 52.07,-99.621 52.524,-99.167 R6.2@52.524,-95.874 ; 46.083,-100.709 ccw(c47.182,-100.709) LED3.2@46.405,-101.486 ; R6.2@52.342,-96.094 cw(c51.905,-96.532) 52.524,-96.532 cw(c53.143,-96.532) R6.2@52.705,-96.094
NetLED3_4: LED3.4 R7.2 | length 14.2
  Top Layer w0.3: LED3.4@47.543,-102.288 47.543,-100.592 47.879,-100.256 53.467,-100.256 53.939,-99.784 R7.2@53.939,-95.874 ; 47.543,-100.734 ccw(c48.642,-100.734) LED3.4@47.865,-101.511 ; R7.2@53.757,-96.094 cw(c53.32,-96.532) 53.939,-96.532 cw(c54.558,-96.532) R7.2@54.12,-96.094
NetLED4_2: LED4.2 R8.2 | length 9.6
  Top Layer w0.3: LED4.2@54.978,-101.486 ccw(c54.069,-100.578) 55.354,-100.578 ; LED4.2@55.154,-101.562 LED4.2@55.154,-102.263 55.354,-102.063 R8.2@55.354,-95.874 ; R8.2@55.173,-96.094 cw(c54.735,-96.532) 55.354,-96.532 cw(c55.973,-96.532) R8.2@55.535,-96.094 ; LED4.2@55.19,-101.698 ccw(c54.793,-101.302) LED4.2@55.354,-101.302
NetLED4_4: LED4.4 R9.2 | length 9
  Top Layer w0.3: LED4.4@56.438,-101.511 ccw(c55.637,-100.711) 56.769,-100.711 ; R9.2@56.588,-96.094 cw(c56.15,-96.532) 56.769,-96.532 cw(c57.388,-96.532) R9.2@56.95,-96.094 ; LED4.4@56.614,-101.625 LED4.4@56.614,-102.288 56.769,-102.133 R9.2@56.769,-95.874
NetLED5_2: LED5.2 R11.2 | length 19
  Top Layer w0.3: LED5.2@64.049,-101.486 ccw(c63.622,-101.059) 64.226,-101.059 ccw(c64.829,-101.059) LED5.2@64.402,-101.486 ; LED5.2@64.226,-102.644 LED5.2@64.226,-102.263 64.226,-99.276 64.467,-99.035 74.246,-99.035 75.184,-98.097 R11.2@75.184,-95.874 ; R11.2@75.003,-96.094 cw(c74.565,-96.532) 75.184,-96.532 cw(c75.803,-96.532) R11.2@75.365,-96.094
NetLED5_4: LED5.4 R12.2 | length 19.1
  Top Layer w0.3: LED5.4@65.509,-101.511 ccw(c65.082,-101.084) 65.686,-101.084 ccw(c66.289,-101.084) LED5.4@65.862,-101.511 ; LED5.4@65.686,-102.669 LED5.4@65.686,-102.288 65.686,-99.808 65.905,-99.589 75.851,-99.589 76.581,-98.859 R12.2@76.581,-95.874 ; R12.2@76.4,-96.094 cw(c75.962,-96.532) 76.581,-96.532 cw(c77.2,-96.532) R12.2@76.762,-96.094
NetLED6_2: LED6.2 R14.2 | length 12.6
  Top Layer w0.3: LED6.2@73.12,-101.486 ccw(c72.694,-101.059) 73.297,-101.059 ccw(c73.901,-101.059) LED6.2@73.474,-101.486 ; LED6.2@73.297,-102.644 LED6.2@73.297,-102.263 73.297,-100.619 73.66,-100.256 77.089,-100.256 77.978,-99.367 R14.2@77.978,-95.874 ; R14.2@77.797,-96.094 cw(c77.359,-96.532) 77.978,-96.532 cw(c78.597,-96.532) R14.2@78.159,-96.094
NetLED6_4: LED6.4 R15.2 | length 14
  Top Layer w0.3: LED6.4@74.608,-101.487 ccw(c74.388,-101.191) 74.757,-101.191 ; LED6.4@74.711,-101.708 cw(c75.199,-101.499) 74.824,-101.124 ; LED6.4@74.757,-102.669 LED6.4@74.757,-102.288 74.757,-101.191 ; LED6.4@74.906,-101.487 cw(c75.126,-101.191) 74.757,-101.191 ; LED6.4@74.987,-101.59 cw(c75.64,-101.312) 75.138,-100.81 ; R15.2@79.194,-96.094 cw(c78.756,-96.532) 79.375,-96.532 cw(c79.994,-96.532) R15.2@79.556,-96.094 ; R15.2@79.375,-95.874 79.375,-100.256 78.821,-100.81 75.138,-100.81 ; 74.757,-101.191 75.138,-100.81
NetLED7_2: LED7.2 R17.2 | length 10.2
  Top Layer w0.3: R17.2@80.591,-96.094 cw(c80.153,-96.532) 80.772,-96.532 cw(c81.391,-96.532) R17.2@80.953,-96.094 ; R17.2@80.772,-95.874 80.772,-100.383 81.216,-100.827 82.232,-100.827 82.369,-100.964 LED7.2@82.369,-102.263 ; LED7.2@82.192,-101.486 ccw(c81.765,-101.059) 82.369,-101.059 ccw(c82.972,-101.059) LED7.2@82.545,-101.486 ; LED7.2@82.369,-102.644 LED7.2@82.369,-101.98
NetLED7_4: LED7.4 R19.2 | length 9.9
  Top Layer w0.3: R19.2@81.988,-96.094 cw(c81.55,-96.532) 82.169,-96.532 cw(c82.788,-96.532) R19.2@82.35,-96.094 ; R19.2@82.169,-95.874 82.169,-98.986 82.169,-100.147 82.296,-100.274 83.211,-100.274 83.829,-100.891 LED7.4@83.829,-102.669 ; LED7.4@83.652,-101.511 ccw(c83.225,-101.084) 83.829,-101.084 ccw(c84.432,-101.084) LED7.4@84.005,-101.511
NetLED8_2: LED8.2 R20.2 | length 15.9
  Top Layer w0.3: R20.2@83.385,-96.094 cw(c82.947,-96.532) 83.566,-96.532 cw(c84.185,-96.532) R20.2@83.747,-96.094 ; R20.2@83.566,-95.874 83.566,-98.787 84.273,-99.494 90.932,-99.494 91.44,-100.002 LED8.2@91.44,-102.644 ; LED8.2@91.263,-101.486 ccw(c90.836,-101.059) 91.44,-101.059 ccw(c92.044,-101.059) LED8.2@91.617,-101.486
NetLED8_4: LED8.4 R22.2 | length 16
  Top Layer w0.3: R22.2@84.782,-96.094 cw(c84.344,-96.532) 84.963,-96.532 cw(c85.582,-96.532) R22.2@85.144,-96.094 ; R22.2@84.963,-95.874 84.963,-98.486 85.336,-98.859 92.075,-98.859 92.9,-99.684 LED8.4@92.9,-102.669 ; LED8.4@92.723,-101.511 ccw(c92.296,-101.084) 92.9,-101.084 ccw(c93.504,-101.084) LED8.4@93.077,-101.511
NetLED9_1: LED9.1 R34.1 | length 3.5
  Top Layer w0.65: LED9.1@47.904,-52.961 49.644,-52.961 R34.1@49.784,-52.821 ; LED9.1@48.251,-53.18 cw(c48.78,-53.71) 48.78,-52.961 cw(c48.78,-52.213) LED9.1@48.251,-52.742 ; 49.342,-52.961 ccw(c49.342,-52.418) R34.1@49.726,-52.802
NetLED10_1: LED10.1 R35.2 | length 2.9
  Top Layer w0.8: LED10.1@42.367,-21.237 R35.2@45.25,-21.237
NetQ1_1: Q1.1 R36.2 R37.2 | length 4.3
  Top Layer w0.65: Q1.1@54.038,-52.821 R37.2@55.88,-52.821 R36.2@57.404,-52.821 ; Q1.1@54.086,-53.186 cw(c54.967,-54.067) 54.967,-52.821
NetQ1_3: Q1.3 R34.2 | length 5.9
  Top Layer w0.65: R34.2@49.784,-51.29 cw(c49.784,-53.323) Q1.3@51.221,-51.885 ; R34.2@49.784,-51.17 50.507,-51.17 Q1.3@51.348,-52.012 ; R34.2@49.808,-51.286 cw(c50.129,-52.308) Q1.3@50.887,-51.551 ; Q1.3@51.038,-52.012 ccw(c50.29,-52.012) 50.819,-51.483 ccw(c51.348,-50.954) Q1.3@51.348,-51.702
NetR42_1: R42.1 U5.4 | length 8.5
  Top Layer w0.3: R42.1@46.926,-12.372 47.329,-11.969 U5.4@52.232,-11.969 ; R42.1@46.934,-12.341 cw(c47.832,-13.24) 47.832,-11.969 ; R42.1@47.146,-12.553 cw(c48.557,-13.964) 48.557,-11.969 ; U5.4@51.419,-12.057 ccw(c51.205,-12.271) 51.205,-11.969 ccw(c51.205,-11.667) U5.4@51.419,-11.881
NetR43_1: R43.1 U5.5 | length 7
  Top Layer w0.3: R43.1@46.926,-13.642 48.006,-13.642 48.679,-12.969 U5.5@52.232,-12.969 ; R43.1@47.146,-13.823 cw(c47.584,-14.261) 47.584,-13.642 cw(c47.584,-13.023) R43.1@47.146,-13.461 ; U5.5@51.419,-13.057 ccw(c51.205,-13.271) 51.205,-12.969 ccw(c51.205,-12.667) U5.5@51.419,-12.881
NetR48_2: R48.2 SW12.2 | length 13.8
  Top Layer w0.3: SW12.2@93.98,-21.516 95.758,-21.516 96.139,-21.897 96.139,-28.755 95.885,-29.009 R48.2@94.297,-29.009 ; R48.2@94.517,-29.19 cw(c94.955,-29.628) 94.955,-29.009 cw(c94.955,-28.39) R48.2@94.517,-28.828 ; SW12.2@94.968,-21.834 cw(c95.736,-22.602) 95.736,-21.516 cw(c95.736,-20.43) SW12.2@94.968,-21.198
NetR49_2: R49.2 U5.51 | length 4.9
  Top Layer w0.3: R49.2@67.564,-49.138 68.232,-48.47 U5.51@68.232,-45.969 ; R49.2@67.564,-48.844 ccw(c67.564,-48.133) 68.067,-48.636 ; R49.2@67.82,-49.1 cw(c68.347,-49.1) 67.975,-48.728 ; U5.51@68.144,-46.782 cw(c67.93,-46.996) 68.232,-46.996 cw(c68.534,-46.996) U5.51@68.32,-46.782
NetR51_2: R51.2 U5.52 | length 4.4
  Top Layer w0.3: R51.2@68.907,-48.919 ccw(c68.121,-48.134) 69.232,-48.134 ; U5.52@69.144,-46.782 cw(c68.93,-46.996) 69.232,-46.996 cw(c69.534,-46.996) U5.52@69.32,-46.782 ; R51.2@69.232,-48.994 U5.52@69.232,-45.969
NTC1: C4.1 J2.4 J4.20 | length 104
  Top Layer w0.3: J2.4@80.144,-125.275 80.144,-121.925 80.645,-121.424 98.255,-121.424 100.281,-119.398 104.091,-119.398 105.375,-118.114 105.375,-94.922 104.994,-94.541 97.536,-94.541 96.927,-93.932 C4.1@96.927,-93.182
  Top Layer w0.45: 90.932,-86.614 cw(c91.451,-86.614) v1@91.084,-86.247 ; v1@90.932,-86.159 90.932,-92.763 91.351,-93.182 C4.1@96.927,-93.182 ; C4.1@96.556,-93.553 ccw(c95.659,-94.45) 95.659,-93.182 ccw(c95.659,-91.915) C4.1@96.556,-92.811
  Bottom Layer w0.45: J4.20@76.533,-76.253 76.962,-76.253 77.851,-77.142 77.851,-81.079 78.667,-81.895 90.224,-81.895 90.932,-82.603 v1@90.932,-86.159 ; J4.20@76.538,-76.34 cw(c76.604,-77.406) 77.36,-76.651 ; J4.20@76.566,-76.789 cw(c76.686,-78.735) 78.065,-77.356 ; 90.932,-85.704 ccw(c91.451,-85.704) v1@91.084,-86.071
  other v1: 90.995,-86.159
NTC2: C6.1 J2.2 J4.22 | length 91.3
  Top Layer w0.3: J2.2@90.144,-125.275 90.144,-122.939 90.551,-122.532 98.714,-122.532 100.74,-120.506 104.55,-120.506 106.483,-118.573 106.483,-92.128 105.975,-91.62 97.282,-91.62 96.927,-91.265 ; C6.1@96.615,-90.71 cw(c96.278,-91.265) 96.927,-91.265 ; C6.1@96.927,-90.198 96.927,-91.265 ; C6.1@97.239,-90.71 ccw(c97.576,-91.265) 96.927,-91.265
  Top Layer w0.45: v1(91.948,-85.778) 91.948,-89.842 92.583,-90.477 C6.1@96.901,-90.477
  Bottom Layer w0.45: J4.22@79.073,-76.79 cw(c79.073,-78.816) 80.505,-77.383 ; J4.22@79.073,-76.253 79.375,-76.253 80.391,-77.269 80.391,-79.936 81.407,-80.952 91.186,-80.952 91.948,-81.714 v1(91.948,-85.778) ; J4.22@79.61,-76.253 ccw(c80.177,-76.253) 79.776,-76.654
NTC3: C2.1 J2.6 J4.19 | length 109.1
  Top Layer w0.3: J2.6@70.144,-125.275 70.144,-120.784 70.612,-120.316 97.796,-120.316 99.822,-118.29 103.632,-118.29 104.267,-117.655 104.267,-97.97 103.759,-97.462 97.282,-97.462 96.927,-97.107 ; C2.1@96.674,-96.711 cw(c96.49,-97.107) 96.927,-97.107 ; C2.1@96.927,-96.167 96.927,-97.107 ; C2.1@97.18,-96.711 ccw(c97.363,-97.107) 96.927,-97.107
  Top Layer w0.45: v1(90.043,-85.778) 90.043,-95.303 90.907,-96.167 C2.1@96.927,-96.167 ; C2.1@96.556,-96.538 ccw(c95.659,-97.434) 95.659,-96.167 ccw(c95.659,-94.899) C2.1@96.556,-95.795
  Bottom Layer w0.45: J4.19@76.268,-79.22 cw(c75.628,-79.86) 76.533,-79.86 cw(c77.438,-79.86) J4.19@76.798,-79.22 ; J4.19@76.533,-78.793 76.533,-81.92 77.216,-82.603 89.408,-82.603 90.043,-83.238 v1(90.043,-85.778)
O_LED1: R1.1 U1.15 | length 13.5
  Top Layer w0.3: R1.1@46.703,-93.985 ccw(c46.436,-93.652) 46.863,-93.652 ; R1.1@46.819,-94.185 cw(c48.002,-94.185) 47.166,-93.349 ; R1.1@46.863,-94.223 46.863,-93.652 ; R1.1@47.023,-93.985 cw(c47.29,-93.652) 46.863,-93.652 ; R1.1@47.119,-94.185 cw(c49.026,-94.185) 47.678,-92.837 ; U1.15@49.897,-86.923 cw(c49.555,-87.265) 50.038,-87.265 cw(c50.521,-87.265) U1.15@50.179,-86.923 ; U1.15@50.038,-86.032 50.038,-88.318 47.752,-90.604 47.752,-92.763 46.863,-93.652
O_LED2: R2.1 U1.1 | length 8.2
  Top Layer w0.3: R2.1@48.097,-94.004 ccw(c46.477,-92.384) U1.1@48.768,-92.384 ; R2.1@48.278,-94.223 48.768,-93.734 ; R2.1@48.283,-93.929 ccw(c48.296,-93.262) 48.768,-93.734 ; R2.1@48.309,-94.216 ccw(c47.201,-93.108) 48.768,-93.108 ; R2.1@48.521,-94.428 ccw(c47.925,-93.832) 48.768,-93.832 ; R2.1@48.535,-94.185 cw(c49.062,-94.185) 48.689,-93.813 ; U1.1@48.627,-92.511 cw(c48.285,-92.853) 48.768,-92.853 cw(c49.251,-92.853) U1.1@48.909,-92.511 ; U1.1@48.768,-91.62 48.768,-93.734
O_LED3: R3.1 U1.2 | length 5.8
  Top Layer w0.3: R3.1@49.512,-94.004 ccw(c48.242,-92.734) 50.038,-92.734 ; R3.1@49.693,-94.223 50.038,-93.879 U1.2@50.038,-91.62 ; R3.1@49.724,-94.216 ccw(c48.966,-93.458) 50.038,-93.458 ; U1.2@49.897,-92.511 cw(c49.555,-92.853) 50.038,-92.853 cw(c50.521,-92.853) U1.2@50.179,-92.511
O_LED4: R4.1 U1.3 | length 4.6
  Top Layer w0.3: R4.1@50.927,-94.004 ccw(c50.008,-93.085) 51.308,-93.085 ; R4.1@51.139,-94.216 ccw(c50.732,-93.809) R4.1@51.308,-93.809 ; U1.3@51.167,-92.511 cw(c50.825,-92.853) 51.308,-92.853 cw(c51.791,-92.853) U1.3@51.449,-92.511 ; R4.1@51.308,-94.024 U1.3@51.308,-91.62
O_LED5: R6.1 U1.4 | length 4.3
  Top Layer w0.3: R6.1@52.342,-94.004 ccw(c51.773,-93.435) 52.578,-93.435 ; U1.4@52.437,-92.511 cw(c52.095,-92.853) 52.578,-92.853 cw(c53.061,-92.853) U1.4@52.719,-92.511 ; R6.1@52.578,-94.169 U1.4@52.578,-91.62 ; 52.578,-93.698 ccw(c53.011,-93.698) R6.1@52.705,-94.004
O_LED6: R7.1 U1.5 | length 4.2
  Top Layer w0.3: U1.5@53.707,-92.511 cw(c53.365,-92.853) 53.848,-92.853 cw(c54.331,-92.853) U1.5@53.989,-92.511 ; R7.1@53.757,-94.004 ccw(c53.539,-93.785) R7.1@53.848,-93.785 ; R7.1@53.848,-94.133 U1.5@53.848,-91.62 ; 53.848,-93.347 ccw(c54.777,-93.347) R7.1@54.12,-94.004
O_LED7: R8.1 U1.6 | length 4.8
  Top Layer w0.3: U1.6@54.977,-92.511 cw(c54.635,-92.853) 55.118,-92.853 cw(c55.601,-92.853) U1.6@55.259,-92.511 ; R8.1@55.118,-93.988 U1.6@55.118,-91.62 ; 55.118,-93.721 ccw(c55.818,-93.721) R8.1@55.323,-94.216 ; 55.118,-92.997 ccw(c56.542,-92.997) R8.1@55.535,-94.004
O_LED8: R9.1 U1.7 | length 5.4
  Top Layer w0.3: U1.7@56.247,-92.511 cw(c55.905,-92.853) 56.388,-92.853 cw(c56.871,-92.853) U1.7@56.529,-92.511 ; R9.1@56.388,-93.843 U1.7@56.388,-91.62 ; 56.388,-93.371 ccw(c57.584,-93.371) R9.1@56.738,-94.216 ; U1.7@56.388,-92.647 ccw(c58.308,-92.647) R9.1@56.95,-94.004
O_LED9: R11.1 U2.15 | length 12.6
  Top Layer w0.3: R11.1@75.003,-94.004 ccw(c73.645,-92.647) 75.565,-92.647 ; R11.1@75.184,-94.223 75.565,-93.842 75.565,-90.858 77.978,-88.445 U2.15@77.978,-86.032 ; R11.1@75.215,-94.216 ccw(c74.369,-93.371) 75.565,-93.371 ; U2.15@77.837,-86.923 cw(c77.495,-87.265) 77.978,-87.265 cw(c78.461,-87.265) U2.15@78.119,-86.923
O_LED10: R12.1 U2.1 | length 4.1
  Top Layer w0.3: R12.1@76.4,-94.004 ccw(c75.655,-93.26) 76.708,-93.26 ; U2.1@76.567,-92.511 cw(c76.225,-92.853) 76.708,-92.853 cw(c77.191,-92.853) U2.1@76.849,-92.511 ; R12.1@76.708,-94.096 U2.1@76.708,-91.62
O_LED11: R14.1 U2.2 | length 4.3
  Top Layer w0.3: R14.1@77.797,-94.004 ccw(c77.359,-93.566) 77.978,-93.566 ccw(c78.597,-93.566) R14.1@78.159,-94.004 ; U2.2@77.837,-92.511 cw(c77.495,-92.853) 77.978,-92.853 cw(c78.461,-92.853) U2.2@78.119,-92.511 ; R14.1@77.978,-94.223 U2.2@77.978,-91.62
O_LED12: R15.1 U2.3 | length 4.1
  Top Layer w0.3: U2.3@79.107,-92.511 cw(c78.765,-92.853) 79.248,-92.853 cw(c79.731,-92.853) U2.3@79.389,-92.511 ; R15.1@79.248,-94.096 U2.3@79.248,-91.62 ; 79.248,-93.26 ccw(c80.301,-93.26) R15.1@79.556,-94.004
O_LED13: R17.1 U2.4 | length 4.9
  Top Layer w0.3: U2.4@80.377,-92.511 cw(c80.035,-92.853) 80.518,-92.853 cw(c81.001,-92.853) U2.4@80.659,-92.511 ; R17.1@80.518,-93.969 U2.4@80.518,-91.62 ; 80.518,-93.677 ccw(c81.28,-93.677) R17.1@80.741,-94.216 ; 80.518,-92.953 ccw(c82.004,-92.953) R17.1@80.953,-94.004
O_LED14: R19.1 U2.5 | length 5.4
  Top Layer w0.3: U2.5@81.647,-92.511 cw(c81.305,-92.853) 81.788,-92.853 cw(c82.271,-92.853) U2.5@81.929,-92.511 ; R19.1@81.788,-93.842 U2.5@81.788,-91.62 ; 81.788,-93.371 ccw(c82.984,-93.371) R19.1@82.138,-94.216 ; U2.5@81.788,-92.647 ccw(c83.708,-92.647) R19.1@82.35,-94.004
O_LED15: R20.1 U2.6 | length 8.4
  Top Layer w0.3: U2.6@82.917,-92.511 cw(c82.575,-92.853) 83.058,-92.853 cw(c83.541,-92.853) U2.6@83.199,-92.511 ; 83.058,-93.788 ccw(c83.963,-93.788) R20.1@83.323,-94.428 ; 83.058,-93.064 ccw(c84.687,-93.064) R20.1@83.535,-94.216 ; U2.6@83.058,-92.34 ccw(c85.411,-92.34) R20.1@83.747,-94.004 ; U2.6@83.058,-91.62 83.058,-93.715 R20.1@83.566,-94.223 ; 83.077,-93.735 ccw(c83.547,-93.265) R20.1@83.561,-93.929 ; 83.155,-93.813 cw(c82.783,-94.185) R20.1@83.31,-94.185
O_LED16: R22.1 U2.7 | length 5.1
  Top Layer w0.3: U2.7@84.187,-92.511 cw(c83.845,-92.853) 84.328,-92.853 cw(c84.811,-92.853) U2.7@84.469,-92.511 ; U2.7@84.328,-91.62 84.328,-93.271 ; R22.1@84.707,-94.185 ccw(c83.413,-94.185) 84.328,-93.271 ; R22.1@84.84,-93.783 cw(c84.437,-94.185) R22.1@85.007,-94.185 ; R22.1@84.963,-94.223 84.963,-93.906 84.328,-93.271
O_LED_RCLK: J4.30 R5.2 U1.12 U2.12 | length 64.3
  Top Layer w0.3: U1.12@53.707,-85.141 ccw(c53.365,-84.799) 53.848,-84.799 ccw(c54.331,-84.799) U1.12@53.989,-85.141 ; v1@53.707,-84.649 cw(c53.365,-84.991) 53.848,-84.991 cw(c54.331,-84.991) v1@53.989,-84.649 ; U1.12@53.848,-86.032 v1(53.848,-84.508) ; U2.12@81.647,-85.141 ccw(c81.305,-84.799) 81.788,-84.799 ccw(c82.271,-84.799) U2.12@81.929,-85.141 ; v1@81.647,-84.776 cw(c81.305,-85.118) 81.788,-85.118 cw(c82.271,-85.118) v1@81.929,-84.776 ; U2.12@81.788,-86.032 v1(81.788,-84.635) ; v1(86.487,-84.381) 87.63,-84.381 ; v1@86.628,-84.522 cw(c86.97,-84.864) 86.97,-84.381 cw(c86.97,-83.898) v1@86.628,-84.24 ; R5.2@87.449,-86.13 ccw(c87.011,-85.692) 87.63,-85.692 ccw(c88.249,-85.692) R5.2@87.811,-86.13 ; R5.2@87.63,-86.222 87.63,-84.381 ; J4.30@89.233,-76.253 91.059,-76.253 91.567,-76.761 91.567,-83.873 91.105,-84.335 87.676,-84.335 87.63,-84.381 ; J4.30@89.666,-76.686 cw(c90.71,-77.73) 90.71,-76.253 cw(c90.71,-74.775) J4.30@89.666,-75.82
  Bottom Layer w0.3: v1(53.848,-84.508) 53.848,-84.889 ; v1@81.588,-84.635 cw(c81.105,-84.635) 81.447,-84.976 cw(c81.788,-85.318) v1@81.788,-84.835 ; v1@81.717,-84.564 cw(c82.16,-85.007) 82.16,-84.381 ; v1@81.929,-84.776 cw(c82.884,-85.731) 82.884,-84.381 ; v1@86.346,-84.522 ccw(c86.004,-84.864) 86.004,-84.381 ccw(c86.004,-83.898) v1@86.346,-84.24 ; v1(86.487,-84.381) 82.042,-84.381 v1(81.788,-84.635) 81.28,-85.143 54.102,-85.143 53.848,-84.889 ; 53.848,-84.889 cw(c54.111,-84.889) 53.962,-84.673 ccw(c54.111,-84.889) 53.848,-84.889 ; 53.848,-84.889 ccw(c53.585,-84.889) 53.734,-84.673 cw(c53.585,-84.889) 53.848,-84.889
O_LED_SER: J4.29 U2.14 | length 19.8
  Top Layer w0.3: U2.14@79.107,-85.141 ccw(c78.765,-84.799) 79.248,-84.799 ccw(c79.731,-84.799) U2.14@79.389,-85.141 ; U2.14@79.248,-86.032 79.248,-83.111 79.629,-82.73 88.773,-82.73 89.233,-82.27 J4.29@89.233,-78.793 ; J4.29@88.8,-79.226 cw(c87.755,-80.27) 89.233,-80.27 cw(c90.71,-80.27) J4.29@89.666,-79.226